# Altium PCB Mach trai tim - Duyen Duc.PcbDoc
Units mil, origin at the board's own origin, x right, y up, seen from the top; angles counter-clockwise.
Board outline 5013.66 x 4485.68 mil, 2 copper layers (Top Layer, Bottom Layer); 18 components, 16 nets, 57 pads, 0 vias.
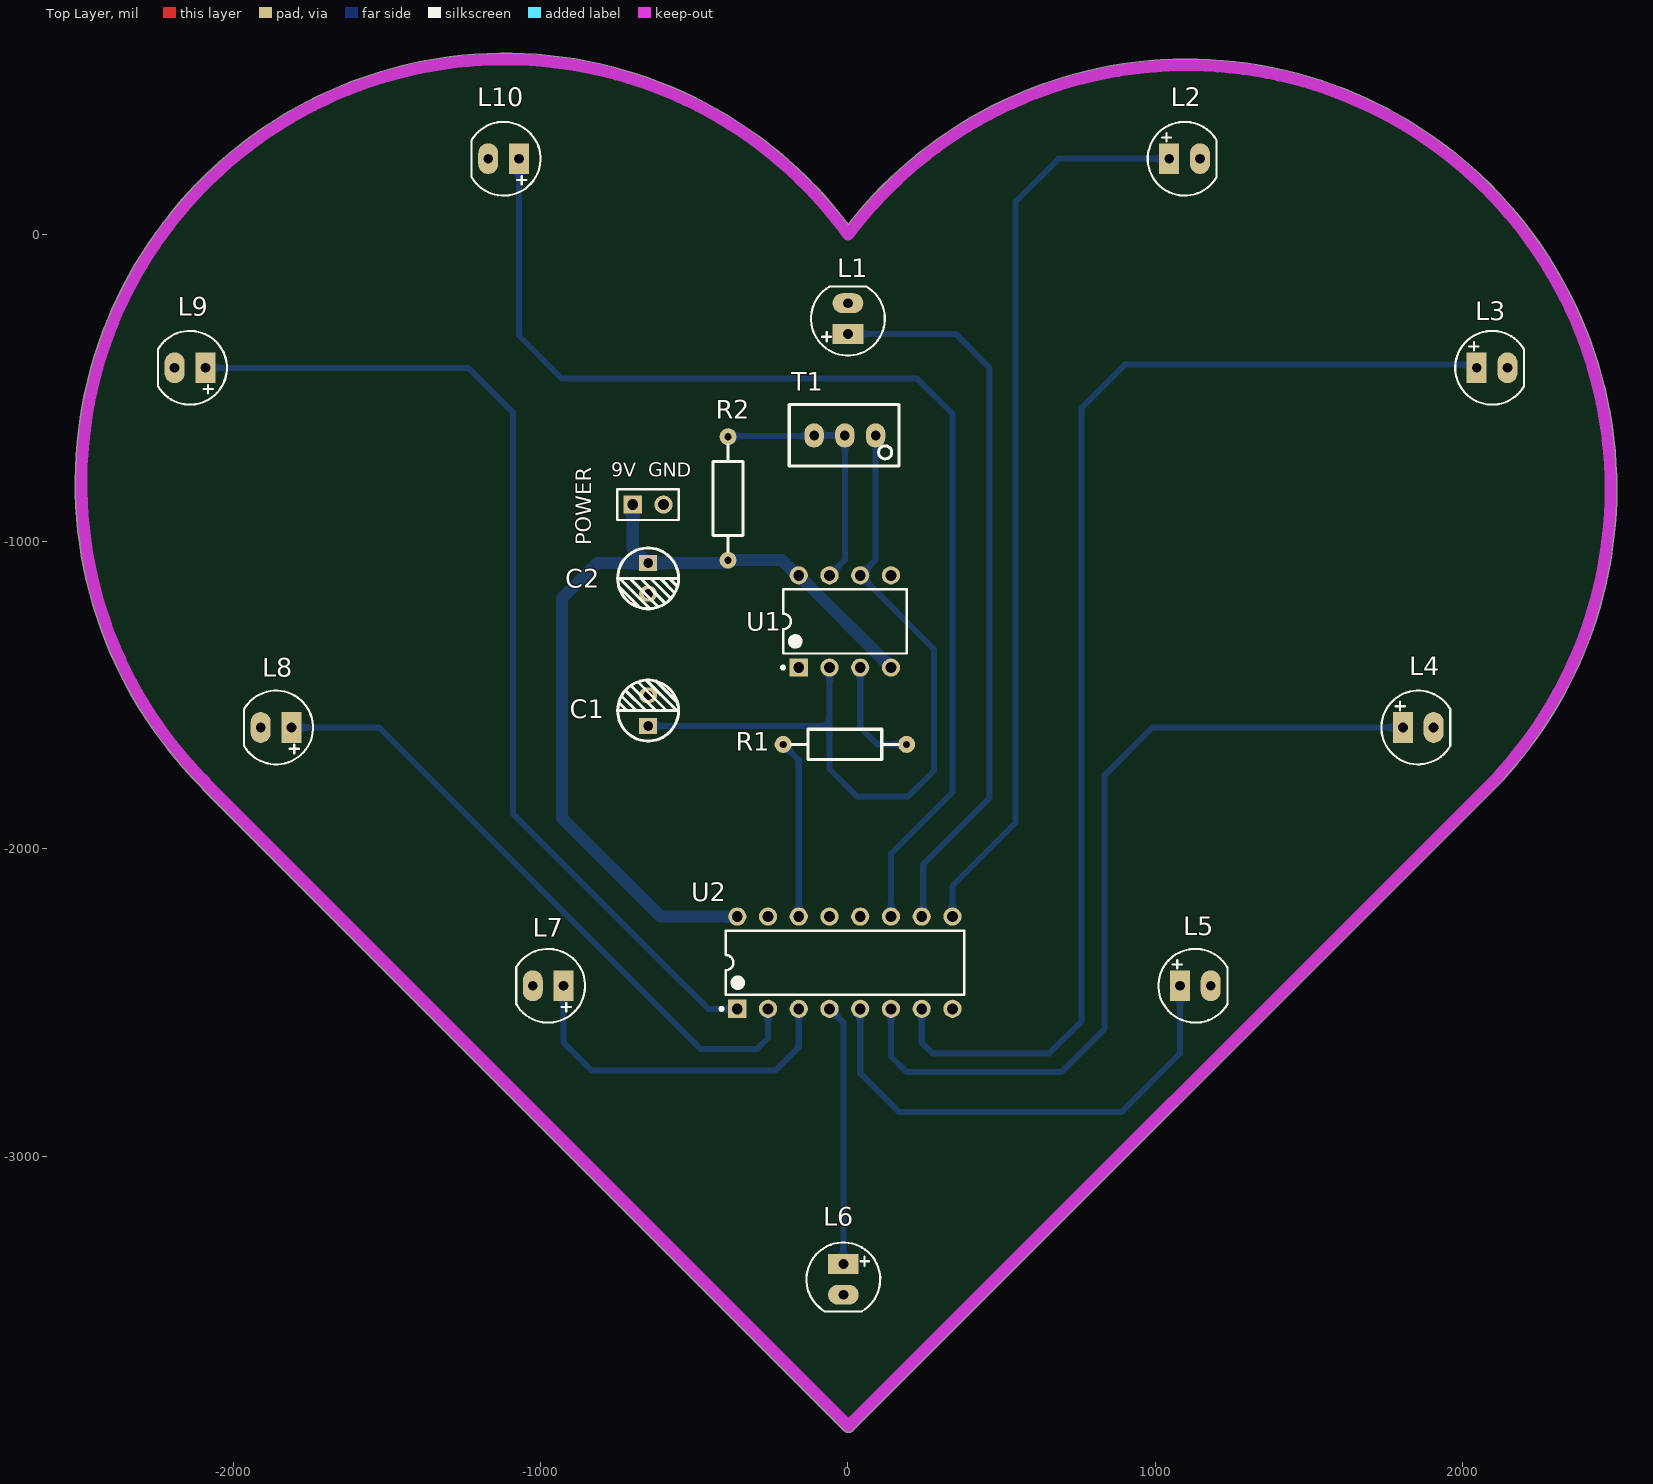
[diagram p0: Top Layer view]
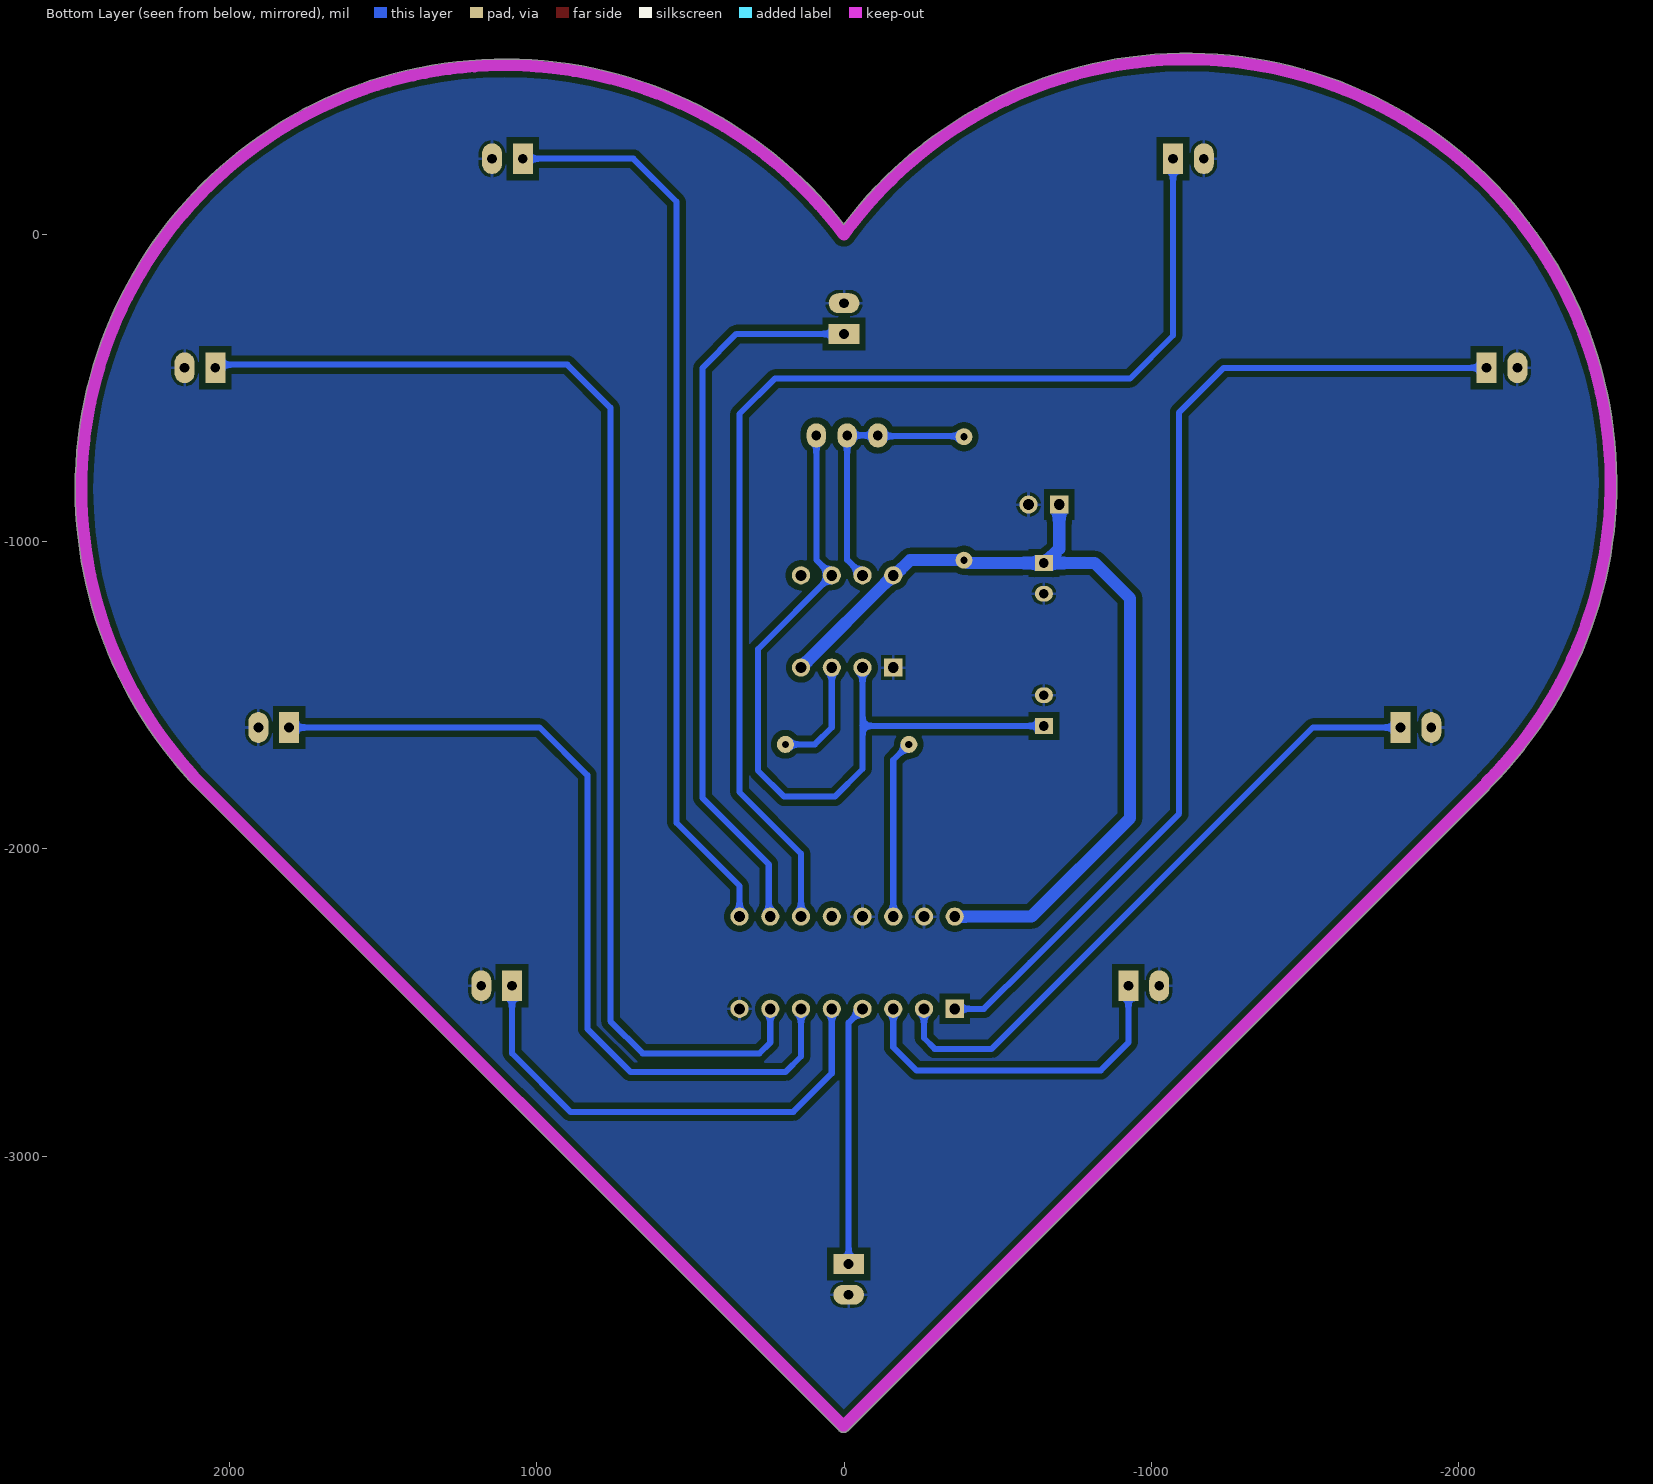
[diagram p1: Bottom Layer view, seen from below]
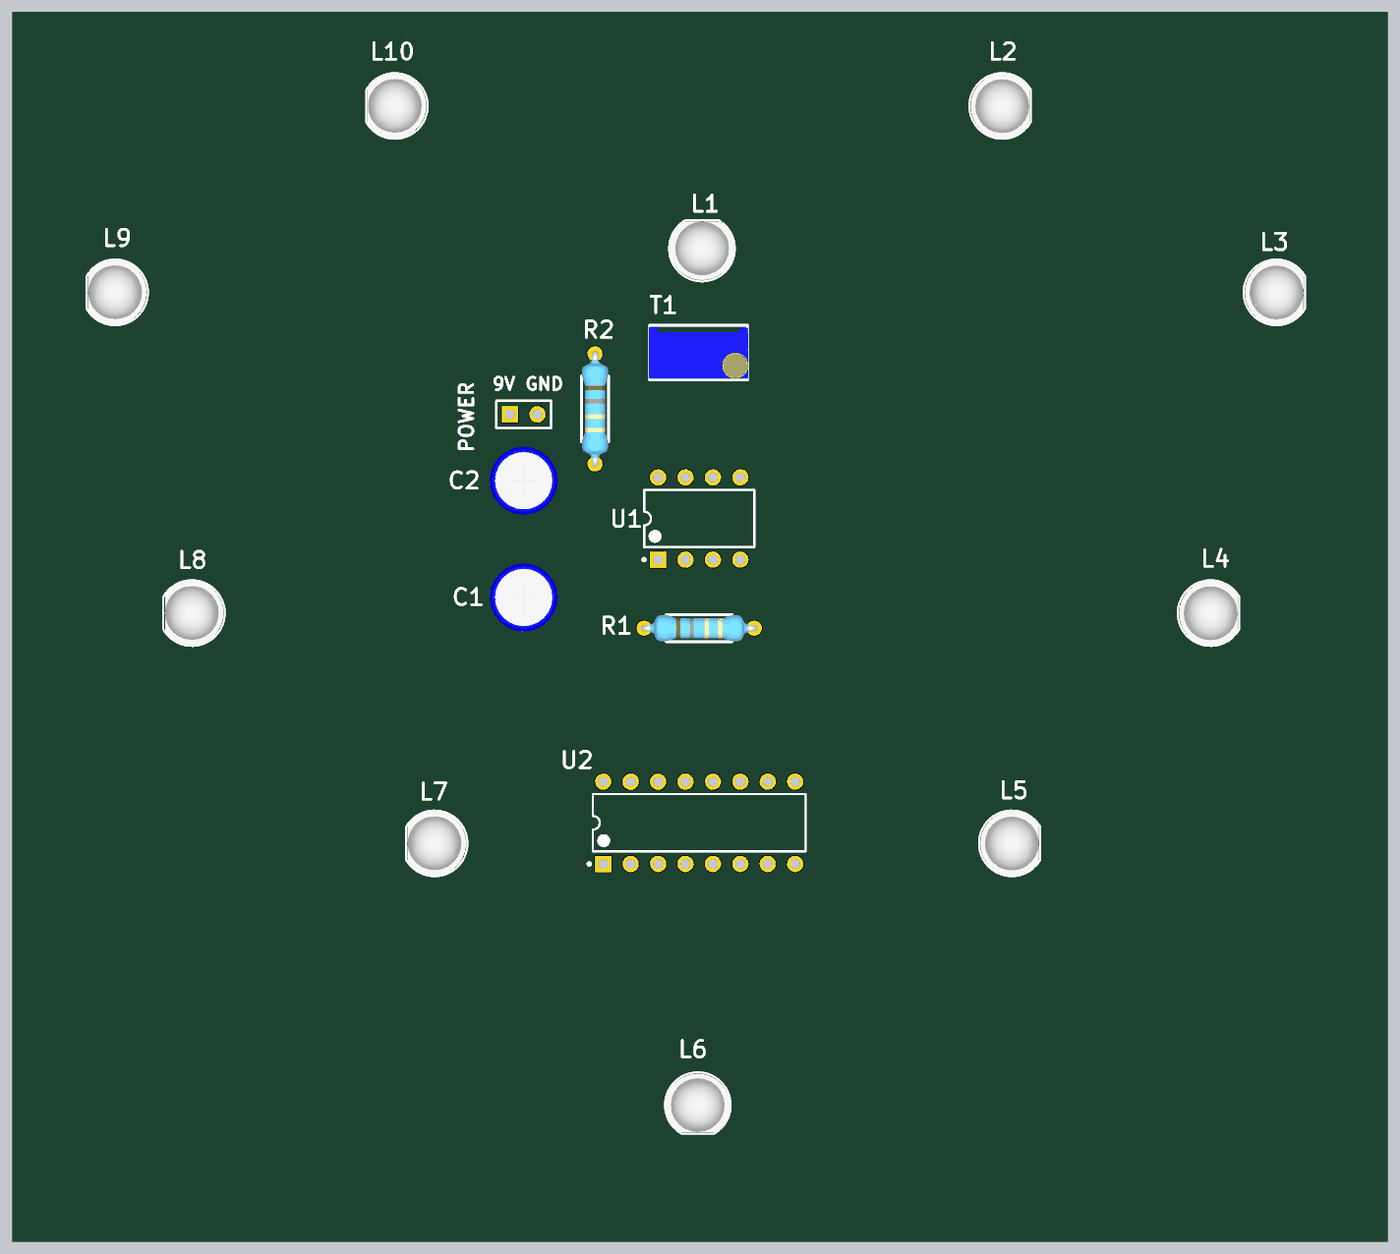
[diagram p2: 3D render of the assembled board from above, using the file's embedded part models]

## Layer stack, top to bottom
Top Solder: solder mask 0.4, Solder Resist, Dk 3.5
Top Layer: signal copper 1.4
Dielectric 1: dielectric 12.6, FR-4, Dk 4.8
Bottom Layer: signal copper 1.4
Bottom Solder: solder mask 0.4, Solder Resist, Dk 3.5

## Board outline
-12.23,-3892.05 -2096.84,-1807.44 cw(c-2082.91,-1793.51) -2101.57,-1799.82 cw(c-2089.88,-1783.96) -2103.81,-1797.89 cw(c-1115.52,-809.6) 0.9,31.25 cw(c1102.85,-828.47) 2500.51,-828.47 cw(c1102.85,-828.47) 2139.59,-1765.82 cw(c2124.98,-1752.62) 2136.56,-1768.55 cw(c2118.07,-1761.73) 2132,-1775.66 15.63,-3892.03 cw(c1.69,-3878.1)

## Design rules (kind name [scope] priority, off if disabled: settings)
Clearance [All] p1: gap=19.68 ignorepadtopadclearanceinfootprint=FALSE
PolygonConnect [All] p1: connectstyle=Relief reliefconductorwidth=10 reliefentries=4 polygonreliefangle="90 Angle" airgapwidth=10
RoutingVias [All] p1: holewidth=28 width=50 viastyle="Through Hole" minholewidth=28 minwidth=50 maxholewidth=28 maxwidth=50
SolderMaskExpansion [All] p1: expansion=4 istentingtop=FALSE
Width [All] p1: maxlimit=39.37 minlimit=19.68 preferedwidth=39.37
30 further rules are at their usual default settings.

## Components (designator, comment, footprint, x,y, rotation, side; value= is the part's Value field where it differs from the comment)
C1 "1uF" "tu hoa 5mm" -650,-1550 r90 top
C2 "1uF" "tu hoa 5mm" -650,-1120 r270 top
L1 "LED 5mm" LED-5MM-RED 0,-325 r90 top (schematic designator l1)
L2 "LED 5mm" LED-5MM-RED 1045,245 r0 top
L3 "LED 5mm" LED-5MM-RED 2045,-435 r0 top
L4 "LED 5mm" LED-5MM-RED 1805,-1605 r0 top
L5 "LED 5mm" LED-5MM-RED 1080,-2445 r0 top
L6 "LED 5mm" LED-5MM-RED -15,-3350 r270 top
L7 "LED 5mm" LED-5MM-RED -925,-2445 r180 top
L8 "LED 5mm" LED-5MM-RED -1810,-1605 r180 top
L9 "LED 5mm" LED-5MM-RED -2090,-435 r180 top
L10 "LED 5mm" LED-5MM-RED -1070,245 r180 top
POWER "Header 2" HDR1X2 -700,-880 r0 top (schematic designator P1)
R1 "10k" "tro vach 1/4w" -10,-1660 r180 top
R2 "10k" "tro vach 1/4w" -390,-860 r90 top
T1 "10K" "Bien Tro Vi Chinh Dung" -10,-655 r180 top
U1 "NE555P" P0008A -10,-1260 r90 top
U2 "CD74HC4017E" N0016A -10,-2370 r90 top

## Footprints (in the part's own frame and the unit in brackets; to place one, negate y for a bottom-side part, rotate by r counter-clockwise, add the part's x,y. Pads: shape width x height; smd on the part's side, far side on the other; paste and mask are expansions set on the pad)
"Bien Tro Vi Chinh Dung" [mm] "Bien tro vi chinh"
  oval 1.6x2 hole 0.8: 1(-2.54,0) 2(0,0) 3(2.54,0)
  silkscreen extent -4.47,-2.54 4.6,2.54, body extent -4.54,-2.4 4.66,2.4, height 12.02
HDR1X2 [mm] "Connector; Header; 2 Position"
  rect 1.5x1.5 hole 0.9: 1(0,0)
  round 1.5 hole 0.9: 2(2.54,0)
  silkscreen extent -1.27,-1.27 3.81,1.27
LED-5MM-RED [mil] "LED 2 PIN, 5 ly , Only colour,pin to pin 100mil"
  rect 65x100 hole 32: 1(0,0)
  oval 65x100 hole 32: 2(100,0)
  silkscreen extent -70,-120 154,120, body extent -65,-119 149,118, height 339
N0016A [mm] "DIP, 16-Leads, Body 19.7x6.6mm, Pitch 2.54mm"
  rect 1.5x1.5 hole 0.9: 1(-3.81,8.89)
  round 1.5 hole 0.9: 2(-3.81,6.35) 3(-3.81,3.81) 4(-3.81,1.27) 5(-3.81,-1.27) 6(-3.81,-3.81) 7(-3.81,-6.35) 8(-3.81,-8.89) 9(3.81,-8.89) 10(3.81,-6.35) 11(3.81,-3.81) 12(3.81,-1.27) 13(3.81,1.27) 14(3.81,3.81) 15(3.81,6.35) 16(3.81,8.89)
  silkscreen extent -3.93,-9.85 2.65,10.31, body extent -3.95,-9.85 3.95,9.85, height 5.08
P0008A [mm] "DIP, 8-Leads, Body 10.15x6.6mm, Pitch 2.54mm"
  rect 1.5x1.5 hole 0.9: 1(-3.81,3.81)
  round 1.5 hole 0.9: 2(-3.81,1.27) 3(-3.81,-1.27) 4(-3.81,-3.81) 5(3.81,-3.81) 6(3.81,-1.27) 7(3.81,1.27) 8(3.81,3.81)
  silkscreen extent -3.93,-5.1 2.65,5.23, body extent -3.95,-5.07 3.95,5.07, height 5.08
"tro vach 1/4w" [mm]
  round 1.4 hole 0.6: 1(-5.1,0) 2(5.1,0)
  silkscreen extent -4.39,-1.25 4.42,1.25, body extent -5.38,-1.2 5.38,1.2, height 2.41
"tu hoa 5mm" [mm]
  rect 1.3x1.5 hole 0.8: 1(-1.27,0)
  oval 1.3x1.5 hole 0.8: 2(1.27,0)
  silkscreen extent -2.51,-2.51 2.51,2.51, body extent -3.12,-3.18 3.23,3.18, height 14.55

## Part data
C1 C2: library part "Tu Hoa 1uF 50V 5x11", "Cắm", Chung_Loai=Cắm, Don_Vi=Con, Ma_Hang=MH001355, So_Chan=2, Ten_Linh_Kien="Tụ Hóa 1uF 50V 5x11MM"
L1 L2 L3 L4 L5 L6 L7 L8 L9 L10: library part "LED 5mm Do", "Cắm", Chung_Loai=Cắm, Don_Vi=Con, Ma_Hang=MH008967, Ten_Linh_Kien="Led 5MM Phủ Đỏ (1000c)"
POWER: "Header, 2-Pin", LatestRevisionDate=17-Jul-2002, LatestRevisionNote="Re-released for DXP Platform.", Publisher="Altium Limited"
R1 R2: library part "Tro Vach 1/4W 1% 10k", "Cắm", Chung_Loai=Cắm, Don_Vi=Con, Ma_Hang=MH006349, So_Chan=2, Ten_Linh_Kien="Trở Vạch 1/4w 1% 10k"
T1: library part "Bien Tro Tinh Chinh 10K Dung", "Cắm", Chung_Loai=Cắm, Don_Vi=Con, Ma_Hang=MH003232, Ten_Linh_Kien="Biến Trở VR 103-10K 3296W"
U1: library part CMP-2000-04954-1, "Precision Timer, 4.5 to 16 V, 0 to 70 degC, 8-Pin DIP, Pb-Free, Tube", Manufacturer=TexasInstruments, Maximum High Level Output Current=-200mA, Maximum Low Level Output Current=200mA, Operating Supply Voltage=5, Package=8PDIP, Package Description="8-Pin Double In-line Package, Body 9.59 x 6.35 mm, Pitch 2.54 mm", Package Reference=P8, Category=Timer, Datasheet URL=http://www.ti.com/general/docs/lit/getliterature.tsp?genericPartNumber=NE555&fileType=pdf, Datasheet Version="Rev. I, 09/2014", Manufacturer URL=http://www.ti.com/, Number of Internal Timers=1, Package URL=http://www.ti.com/lit/ml/mpdi001b/mpdi001b.pdf, Packaging=Rail/Tube, Rad Hard=No, Type=Standard
U2: library part CMP-1623-00548-2, "High Speed CMOS Logic Decade Counter/Divider with 10 Decoded Outputs, N0016A, TUBE", F @ Nom Voltage(Max)(Mhz)=28, Generic Part Number=CD74HC4017, ICC @ Nom Voltage(Max)(mA)=0.08, Manufacturer="Texas Instruments", Operating Temperature Range(C)="-55 to 125", Rating=Catalog, tpd @ Nom Voltage(Max)(ns)=54, Voltage(Nom)(V)=3.3,5, Bits(#)=10, Code_JEDEC=MS-001, DatasheetVersion=SCHS200D, Function=Counter, Input Type=LVTTL/CMOS, Inputs=1, Output Drive (IOL/IOH)(Max)(mA)=5.2/-5.2, Output Type=CMOS, PackageReference=N0016A, Schmitt Trigger=No, Technology Family=HC, Type=Decade, VCC(Max)(V)=6, VCC(Min)(V)=2

## Nets (pads, with @x,y where several pads share a name; then routed paths per layer and width w, separated by ;. In a path a pad name is that pad's centre, name@x,y a point inside that pad or via, vN(x,y) a via of type N, cw(c..) or ccw(c..) an arc to the next point about the centre after c; other vN are vias at no path point)
GND: C1.2 C2.2 L1.2 L2.2 L3.2 L4.2 L5.2 L6.2 L7.2 L8.2 L9.2 L10.2 POWER.2 U1.1 U2.8 U2.13 U2.15
NetC1_1: C1.1 T1.1 U1.2 U1.6 | length 2542.6
  Bottom Layer w19.68: C1.1 -60,-1600 ; U1.2 -60,-1600 ; T1.1 90,-1060 U1.6 280,-1350 280,-1745 195,-1830 30,-1830 -60,-1740 -60,-1600
Netl1_1: L1.1 U2.10 | length 2381.7
  Bottom Layer w19.68: L1.1 350,-325 460,-435 460,-1835 245,-2050 245,-2215 U2.10
NetL2_1: L2.1 U2.9 | length 2967.9
  Bottom Layer w19.68: U2.9 340,-2120 545,-1915 545,105 685,245 L2.1
NetL3_1: L3.1 U2.7 | length 4030.1
  Bottom Layer w19.68: U2.7 240,-2630 275,-2665 655,-2665 760,-2560 760,-565 900,-425 2035,-425 L3.1
NetL4_1: L4.1 U2.6 | length 2787.9
  Bottom Layer w19.68: U2.6 140,-2675 190,-2725 695,-2725 835,-2585 835,-1760 990,-1605 L4.1
NetL5_1: L5.1 U2.5 | length 1600.5
  Bottom Layer w19.68: U2.5 40,-2730 165,-2855 890,-2855 1080,-2665 L5.1
NetL6_1: L6.1 U2.4 | length 848.6
  Bottom Layer w19.68: U2.4 -15,-2565 L6.1
NetL7_1: L7.1 U2.3 | length 1143.3
  Bottom Layer w19.68: L7.1 -925,-2630 -835,-2720 -235,-2720 -160,-2645 U2.3
NetL8_1: L8.1 U2.2 | length 2092.4
  Bottom Layer w19.68: L8.1 -1525,-1605 -480,-2650 -295,-2650 -260,-2615 U2.2
NetL9_1: L9.1 U2.1 | length 3358.1
  Bottom Layer w19.68: L9.1 -1235,-435 -1090,-580 -1090,-1885 -605,-2370 -455,-2520 U2.1
NetL10_1: L10.1 U2.11 | length 3808.5
  Bottom Layer w19.68: L10.1 -1070,-330 -930,-470 225,-470 340,-585 340,-1815 140,-2015 U2.11
NetR1_1: R1.1 U1.3 | length 368.6
  Bottom Layer w19.68: U1.3 40,-1605 95,-1660 R1.1
NetR1_2: R1.2 U2.14 | length 581
  Bottom Layer w19.68: R1.2 -160,-1710.79 U2.14
NetR2_2: R2.2 T1.2 T1.3 U1.7 | length 857.5
  Bottom Layer w19.68: R2.2 -387.89,-657.11 -112.11,-657.11 T1.3 T1.2 -10,-1060 U1.7
VCC: C2.1 POWER.1 R2.1 U1.4 U1.8 U2.16 | length 2892.7
  Bottom Layer w39.37: POWER.1 -700,-1023.94 C2.1@-653.94,-1070 ; U2.16 -610,-2220 -930,-1900 -930,-1185 -815,-1070 C2.1@-653.94,-1070 ; U1.4 U1.8 -165.33,-1110 -214.54,-1060.79 R2.1 -394.26,-1060.79 -403.47,-1070 C2.1 C2.1@-653.94,-1070
pads on no net: U1.5 U2.12

## Polygon pours and split planes (outlines as drawn)
GND on Bottom Layer "GND_L02_P001" (solid, pour order 1): 10,-10 -250,270 -545,445 -850,545 -1515,520 -1775,405 -2035,225 -2285,-70 -2410,-310 -2480,-555 -2500,-905 -2430,-1270 -2190,-1690 -5,-3875 2125,-1750 2340,-1460 2425,-1255 2495,-915 2465,-535 2350,-210 2095,140 1775,385 1375,535 1045,555 745,510 470,395 195,215 0,-5

## Keep-outs
Keep-Out Layer:
  lines w39.37: -2089.88,-1783.96 cw(c-1115.52,-809.6) 0.62,-1.53 cw(c1102.85,-828.47) 2124.97,-1752.61 ; -2082.91,-1793.51 1.69,-3878.11 2118.07,-1761.73

## Silkscreen, mask and mechanical layers (free items; w line width, h text height)
Top Overlay:
  text "9V" at -770,-790 h45
  text "GND" at -650,-790 h45